# Altium PCB switch_tx.PcbDoc
Units mm, origin at the board's own origin, x right, y up, seen from the top; angles counter-clockwise.
Board outline 49.91 x 62.61 mm, 2 copper layers (Top Layer, Bottom Layer); 41 components, 31 nets, 151 pads, 1462 vias.
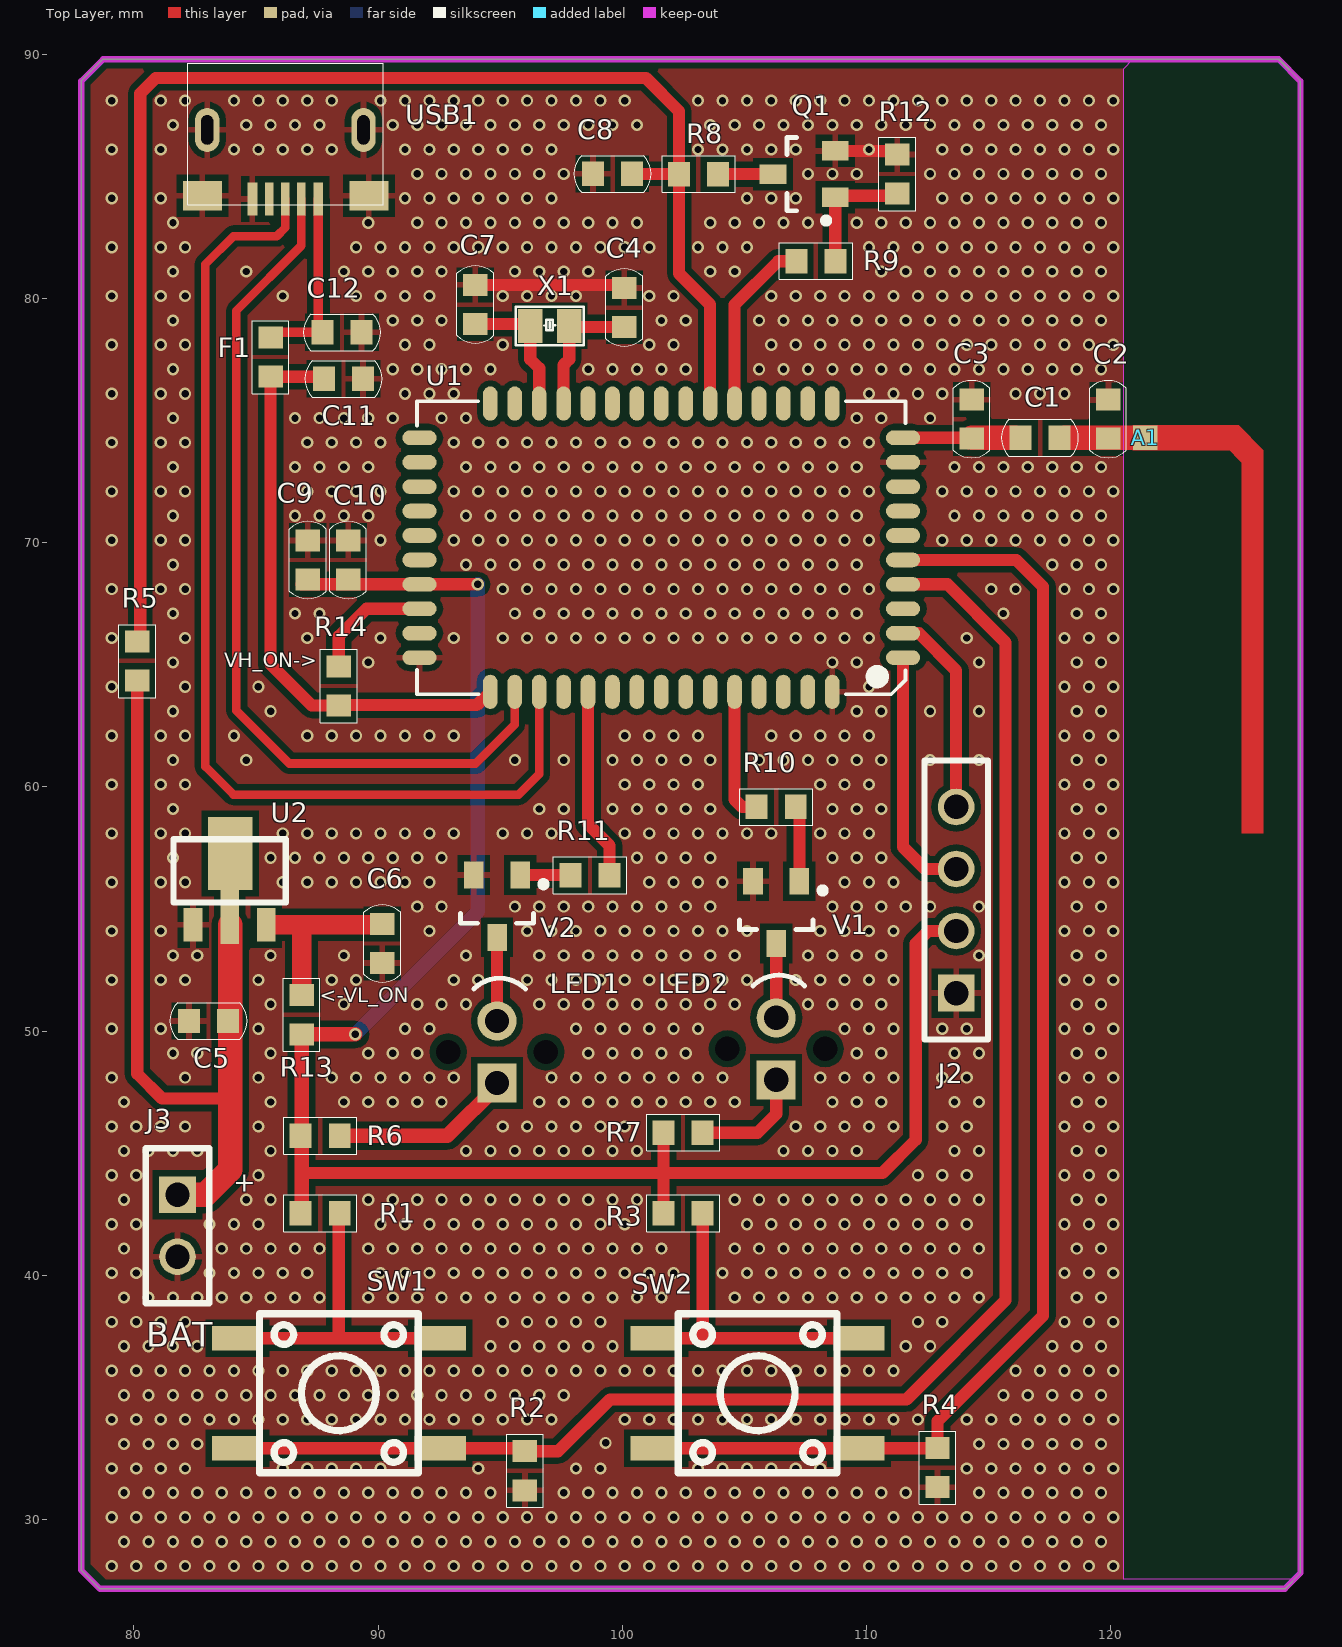
[diagram p0: Top Layer view]
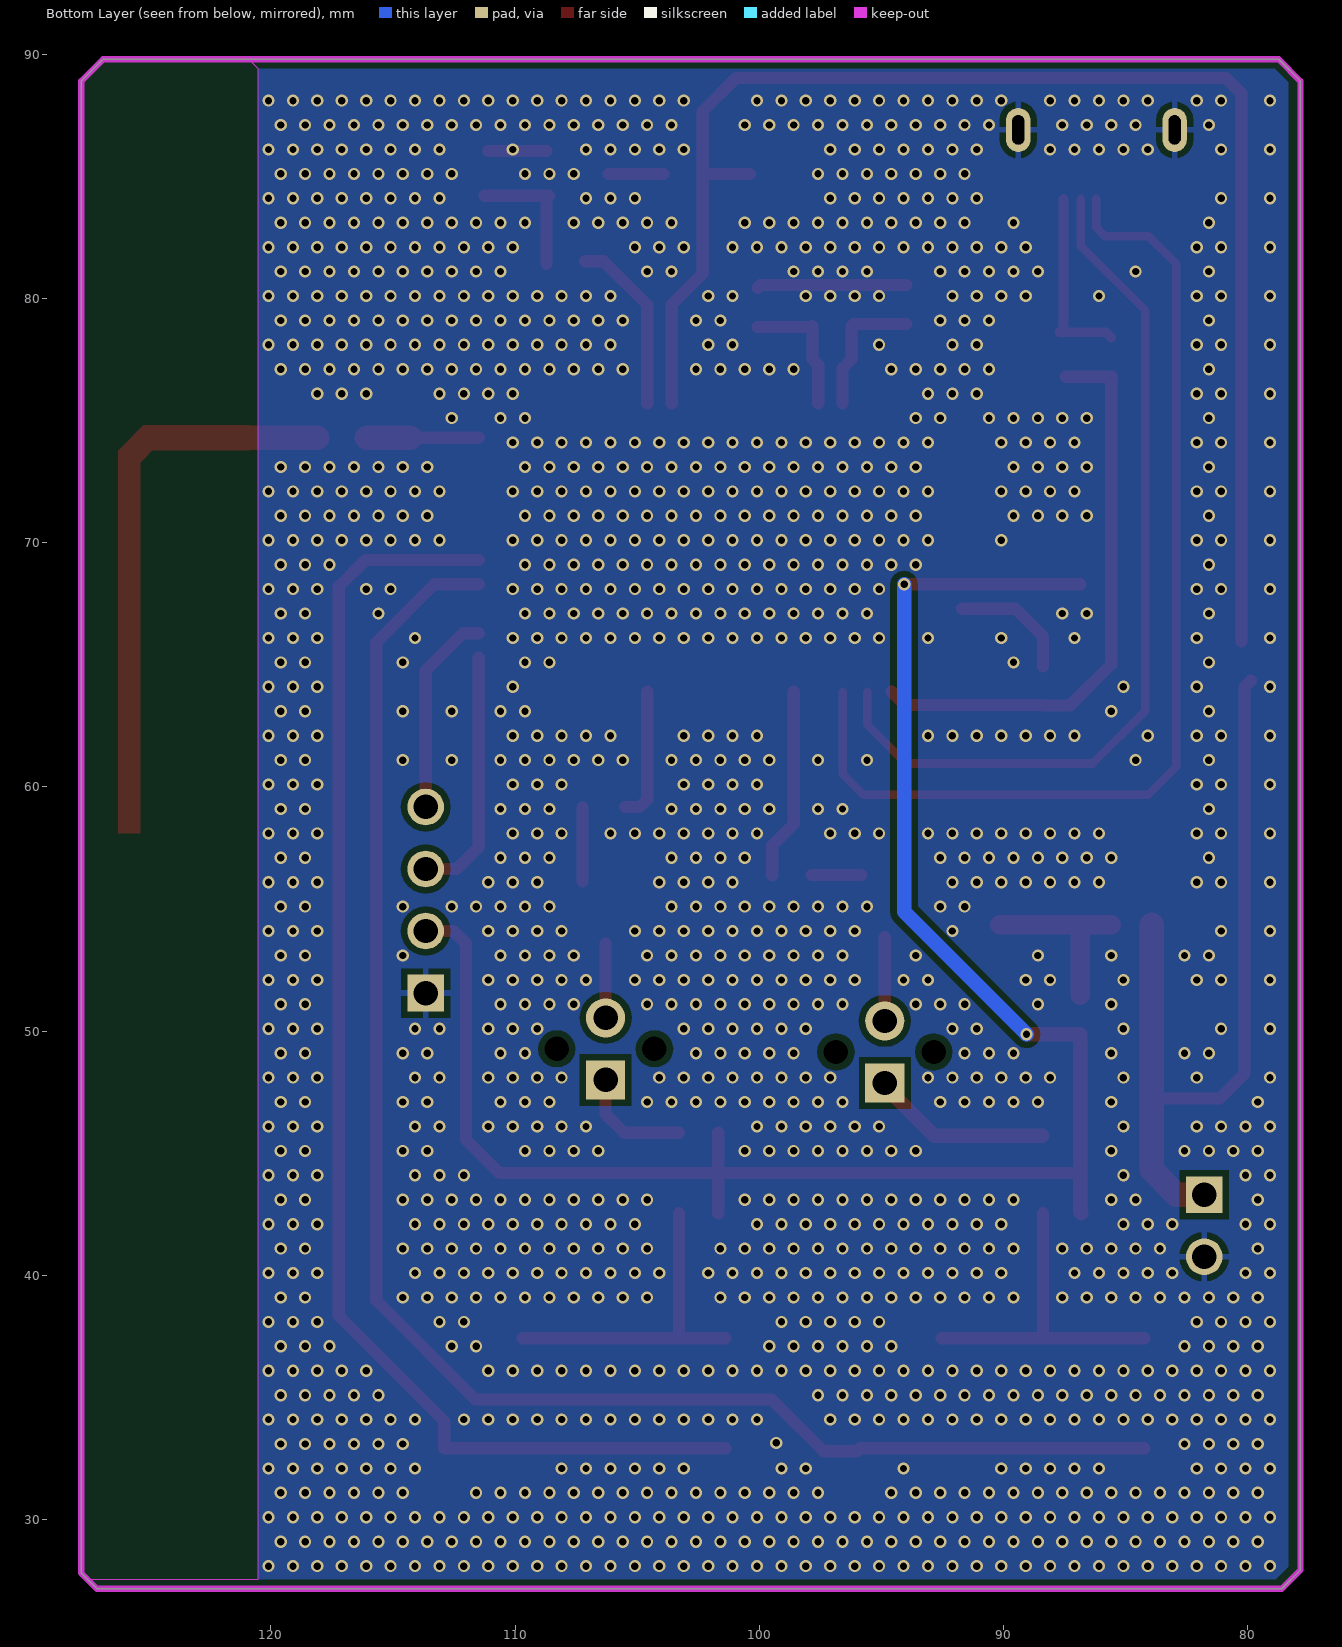
[diagram p1: Bottom Layer view, seen from below]

## Layer stack, top to bottom
Top Solder: solder mask 0.0102, Solder Resist, Dk 3.5
Top Layer: signal copper 0.0356
Dielectric 1: dielectric 0.32, FR-4, Dk 4.8
Bottom Layer: signal copper 0.0356
Bottom Solder: solder mask 0.0102, Solder Resist, Dk 3.5

## Board outline
77.851,27.94 78.613,27.178 127.127,27.178 127.762,27.813 127.762,88.9 126.873,89.789 78.74,89.789 77.851,88.9

## Design rules (kind name [scope] priority, off if disabled: settings)
Clearance [All] p1: gap=0.254
PlaneConnect [All] p1: planeconnectstyle=Direct reliefexpansion=0.508 reliefentries=4 reliefconductorwidth=0.254 reliefairgap=0.254
PolygonConnect PolygonConnect_1 [All vs IsVia] p1: connectstyle=Direct reliefconductorwidth=0.254 reliefentries=4 polygonreliefangle="90 Angle" airgapwidth=0.254
PolygonConnect [All] p2: connectstyle=Relief reliefconductorwidth=0.254 reliefentries=4 polygonreliefangle="90 Angle" airgapwidth=0.254
RoutingVias [All] p1: holewidth=0.711 width=1.27 viastyle="Through Hole" minholewidth=0.711 minwidth=1.27 maxholewidth=0.711 maxwidth=1.27
SolderMaskExpansion [All] p1: expansion=0.102
Width [All] p1: maxlimit=2 minlimit=0.254 preferedwidth=0.254
29 further rules are at their usual default settings.

## Components (designator, comment, footprint, x,y, rotation, side; value= is the part's Value field where it differs from the comment)
A1 "ANTENNA" AN2 121.412,74.295 r0 top
C1 "CAP" cap0603(1608) 117.094,74.295 r180 top
C2 "CAP" cap0603(1608) 119.888,75.057 r270 top
C3 "CAP" cap0603(1608) 114.3,75.057 r90 top
C4 "CAP" cap0603(1608) 100.076,79.629 r270 top
C5 "CC103" cap0603(1608) 83.058,50.419 r180 top
C6 "CC103" cap0603(1608) 90.17,53.594 r270 top
C7 "CAP" cap0603(1608) 93.98,79.756 r270 top
C8 "CAP" cap0603(1608) 99.6,85.1 r0 top
C9 "CC103" cap0603(1608) 87.122,69.29 r90 top
C10 "CC103" cap0603(1608) 88.773,69.29 r90 top
C11 "CC103" cap0603(1608) 88.584,76.708 r0 top
C12 "CC103" cap0603(1608) 88.519,78.613 r0 top
F1 "1A" RESC0603(1608)_N 85.598,77.597 r90 top
J2 "HEAD-1x4" HEAD-1x4-2.54 113.665,51.562 r90 top
J3 "BAT" HEAD-1x2-2.54 81.788,43.307 r270 top
LED1 "LED" led_3mm 94.869,49.149 r90 top
LED2 "LED" led_3mm 106.299,49.276 r90 top
Q1 "BSH103" SOT-23-mosfet 107.442,85.09 r90 top
R1 "10K" RESC0603(1608)_N 87.63,42.545 r180 top
R2 "100K" RESC0603(1608)_N 96.012,32.004 r90 top
R3 "10K" RESC0603(1608)_N 102.489,42.545 r180 top
R4 "100K" RESC0603(1608)_N 112.903,32.131 r270 top
R5 "47K_1%" RESC0603(1608)_N 80.137,65.151 r90 top
R6 "4.7K" RESC0603(1608)_N 87.63,45.72 r180 top
R7 "4.7K" RESC0603(1608)_N 102.489,45.847 r180 top
R8 "22K_1%" RESC0603(1608)_N 103.124,85.09 r180 top
R9 "1K" RESC0603(1608)_N 107.93,81.526 r180 top
R10 "10K" RESC0603(1608)_N 106.299,59.182 r0 top
R11 "10K" RESC0603(1608)_N 98.679,56.388 r180 top
R12 "100K" RESC0603(1608)_N 111.252,85.09 r270 top
R13 "0" RESC0603(1608)_N 86.868,50.673 r90 top
R14 "NC" RESC0603(1608)_N 88.392,64.135 r90 top
SW1 "TACT" SW_6X6X5mm 88.392,35.179 r180 top
SW2 "TACT" SW_6X6X5mm 105.537,35.179 r180 top
U1 "MO100F7, nRF52840 module, YuLiWuLi" MO100F7 91.694,74.295 r270 top locked
U2 "HT7333" HT7333-SOT-89 82.423,54.356 r0 top
USB1 "32010-05002-1220" "MICRO USB" 87.553,84.074 r0 top
V1 "NPN" SOT-23-NPN 106.299,54.864 r180 top
V2 "NPN" SOT-23-NPN 94.869,55.118 r180 top
X1 "32.768KHz" 32.768_A 97.028,78.867 r0 top

## Footprints (in the part's own frame and the unit in brackets; to place one, negate y for a bottom-side part, rotate by r counter-clockwise, add the part's x,y. Pads: shape width x height; smd on the part's side, far side on the other; paste and mask are expansions set on the pad)
32.768_A [mm]
  rect 1x1.4 smd mask+0.05: 1(-0.8,0) 2(0.8,0)
  silkscreen extent -1.4,-0.79 1.4,0.79, body extent -1.1,-0.67 1.1,0.68, height 0.7
AN2 [mm]
  rect 1x1 smd: 1(0,0)
  Top Layer region: 3.109,-0.188 4.132,-1.211 4.842,-0.501 3.819,0.522
  Top Layer region: 3.937,-16.202 4.842,-16.202 4.842,-0.501 3.937,-0.501
  Top Layer region: -0.534,0.522 -0.534,-0.524 3.819,-0.524 3.819,0.522
cap0603(1608) [mm] "Chip capcitance, Body 1.6x0.8mm, IPC Medium Density"
  rect 0.9x1 smd: 1(-0.8,0) 2(0.8,0)
  silkscreen extent -1.58,-0.75 1.58,0.75, body extent -0.85,-0.47 0.85,0.47, height 0.6
HEAD-1x2-2.54 [mm]
  rect 1.5x1.5 hole 1: 1(0,0)
  round 1.5 hole 1: 2(2.54,0)
  silkscreen extent -1.9,-1.3 4.44,1.3
HEAD-1x4-2.54 [mm]
  rect 1.5x1.5 hole 1: 1(0,0)
  round 1.5 hole 1: 2(2.54,0) 3(5.08,0) 4(7.62,0)
  silkscreen extent -1.9,-1.3 9.53,1.3
HT7333-SOT-89 [mil]
  rect 30x54 smd: 1(0,0) 3(118,0)
  rect 30x86.61 smd: 2(59,12.76)
  rect 72x118.11 smd: 2(60,115)
  silkscreen extent -32,36 150,138
led_3mm [mm] "LED_3MM"
  rect 1.6x1.6 / inner round 1.524 / far side rect 1.6x1.6 hole 1: 1(-1.27,0)
  round 1.6 / inner round 1.524 / far side round 1.6 hole 1: 2(1.27,0)
  round 0.1 / inner round 1.524 / far side round 0.1 hole 1 unplated: " "(0,2) " "(0,-2)
  silkscreen extent 2.58,-1.17 3.02,0.95, body extent -2.51,-2.51 2.51,2.51, height 3.81
"MICRO USB" [mm]
  rect 0.4x1.35 smd: 1(0,0) 5(-2.7,0)
  rect 0.35x1.35 smd: 2(-0.7,0) 3(-1.35,0) 4(-2,0)
  oval 1x1.8 hole 0.5 slot 1.2 at 90 deg: 6(1.85,2.827) 7(-4.55,2.827)
  rect 1.6x1.2 smd: 6(2.07,0.127) 7(-4.749,0.127)
  silkscreen extent -5.35,-0.25 2.65,5.56, body extent -5.35,-0.26 2.65,5.56, height 2.77
MO100F7 [mm]
  oval 0.6x1.4 smd mask+0.06: 1(0,0) 2(1,0) 3(2,0) 4(3,0) 5(4,0) 6(5,0) 7(6,0) 8(7,0) 9(8,0) 10(9,0) 26(9,19.8) 27(8,19.8) 28(7,19.8) 29(6,19.8) 30(5,19.8) 31(4,19.8) 32(3,19.8) 33(2,19.8) 34(1,19.8) 35(0,19.8)
  oval 1.4x0.6 smd mask+0.06: 11(10.4,2.9) 12(10.4,3.9) 13(10.4,4.9) 14(10.4,5.9) 15(10.4,6.9) 16(10.4,7.9) 17(10.4,8.9) 18(10.4,9.9) 19(10.4,10.9) 20(10.4,11.9) 21(10.4,12.9) 22(10.4,13.9) 23(10.4,14.9) 24(10.4,15.9) 25(10.4,16.9) 36(-1.4,16.9) 37(-1.4,15.9) 38(-1.4,14.9) 39(-1.4,13.9) 40(-1.4,12.9) 41(-1.4,11.9) 42(-1.4,10.9) 43(-1.4,9.9) 44(-1.4,8.9) 45(-1.4,7.9) 46(-1.4,6.9) 47(-1.4,5.9) 48(-1.4,4.9) 49(-1.4,3.9) 50(-1.4,2.9)
  silkscreen extent -1.5,-0.1 10.5,19.9, body extent -1.52,-0.13 10.54,19.94, height 2.05
RESC0603(1608)_N [mm] "Chip Resistor, Body 1.6x0.8mm, IPC Medium Density"
  rect 0.9x1 smd: 1(-0.8,0) 2(0.8,0)
  silkscreen extent -1.5,-0.75 1.5,0.75, body extent -0.85,-0.47 0.85,0.47, height 0.6
SOT-23-mosfet [mm] "SOT-23, 3-Leads, Body 3,0x2,6mm (max), Pitch 0,95mm, IPC Medium Density"
  rect 0.8x1.1 smd: D(0,1.275) G(-0.95,-1.275) S(0.95,-1.275)
  silkscreen extent -2.03,-1.03 1.5,0.7, body extent -1.45,-1.21 1.45,1.21, height 0.98
SOT-23-NPN [mm]
  rect 0.8x1.1 smd: B(-0.95,-1.275) C(0,1.275) E(0.95,-1.275)
  silkscreen extent -2.03,-1.02 1.5,0.7, body extent -1.45,-1.21 1.45,1.21, height 0.98
SW_6X6X5mm [mm]
  rect 2.1x1 smd: 1(-4.15,2.25) 1(4.15,2.25) 2(-4.15,-2.25) 2(4.15,-2.25)
  silkscreen extent -3.25,-3.25 3.25,3.25, body extent -4.5,-3 4.5,3, height 5

## Part data
A1: "PCB Antenna"
J3: library part HEAD-1x2
Q1: library part MOSFET-N, "N channel MOSFET, 20V, 3.7A, 39mohm"
SW1 SW2: library part SWITCH_TACT_SPST_2-2_PINS
U1: library part MO100F7
USB1: library part Component_1, "Mirco_USB_5S_B"
X1: library part Crystal_2PIN

## Via types
v1: diameter 0.5, hole 0.3, Top Layer to Bottom Layer, tented both sides, 1462 vias

## Nets (pads, with @x,y where several pads share a name; then routed paths per layer and width w, separated by ;. In a path a pad name is that pad's centre, name@x,y a point inside that pad or via, vN(x,y) a via of type N, cw(c..) or ccw(c..) an arc to the next point about the centre after c; other vN are vias at no path point)
BAT+: C5.1 J3.1 R5.1 U2.2 | length 33
  Top Layer w0.5: R5.1@79.883,64.351 80.137,64.097 80.137,48.26 81.153,47.244 83.947,47.244
  Top Layer w1: J3.1 82.931,43.307 83.947,44.323 U2.2@83.947,54.356
BAT_DET: C8.2 R5.2 R8.2 U1.41 | length 59.7
  Top Layer w0.5: R5.2@80.264,65.951 80.264,88.392 80.899,89.027 100.965,89.027 102.324,87.668 R8.2 102.324,81.024 103.594,79.754 U1.41 ; C8.2 R8.2@102.314,85.1
BAT_DET_EN: R9.2 U1.40 | length 7.3
  Top Layer w0.5: U1.40 104.594,79.74 106.38,81.526 R9.2
D+: U1.13 USB1.3 | length 43.5
  Top Layer w0.35: USB1.3 86.203,82.901 85.852,82.55 84.074,82.55 82.931,81.407 82.931,60.833 84.074,59.69 95.758,59.69 96.594,60.526 U1.13
D-: U1.12 USB1.2 | length 36.3
  Top Layer w0.35: USB1.2 86.853,82.154 84.201,79.502 84.201,63.119 86.36,60.96 93.996,60.96 95.594,62.558 U1.12
GND: C2.1 C3.2 C4.1 C5.2 C6.2 C7.1 C8.1 C9.2 C10.2 C11.2 C12.2 J2.1 J3.2 Q1.S R2.1 R4.2 R12.1 U1.10 U1.25 U1.34 U2.1 USB1.5 USB1.6 USB1.7 V1.E V2.E | length 8.5
  Top Layer w0.5: C7.1 99.949,80.556 C4.1 ; Q1.S R12.1@111.102,86.04
  other v1: 79.1,28.1 80.1,28.1 81.1,28.1 82.1,28.1 83.1,28.1 84.1,28.1 85.1,28.1 86.1,28.1 87.1,28.1 88.1,28.1 89.1,28.1 90.1,28.1 91.1,28.1 92.1,28.1 93.1,28.1 94.1,28.1 95.1,28.1 96.1,28.1 97.1,28.1 98.1,28.1 99.1,28.1 100.1,28.1 101.1,28.1 102.1,28.1 103.1,28.1 104.1,28.1 105.1,28.1 106.1,28.1 107.1,28.1 108.1,28.1 109.1,28.1 110.1,28.1 111.1,28.1 112.1,28.1 113.1,28.1 114.1,28.1 115.1,28.1 116.1,28.1 117.1,28.1 118.1,28.1 119.1,28.1 120.1,28.1 79.6,29.1 80.6,29.1 81.6,29.1 82.6,29.1 83.6,29.1 84.6,29.1 85.6,29.1 86.6,29.1 87.6,29.1 88.6,29.1 89.6,29.1 90.6,29.1 91.6,29.1 92.6,29.1 93.6,29.1 94.6,29.1 95.6,29.1 96.6,29.1 97.6,29.1 98.6,29.1 99.6,29.1 100.6,29.1 101.6,29.1 102.6,29.1 103.6,29.1 104.6,29.1 105.6,29.1 106.6,29.1 107.6,29.1 108.6,29.1 109.6,29.1 110.6,29.1 111.6,29.1 112.6,29.1 113.6,29.1 114.6,29.1 115.6,29.1 116.6,29.1 117.6,29.1 118.6,29.1 119.6,29.1 79.1,30.1 80.1,30.1 81.1,30.1 82.1,30.1 83.1,30.1 84.1,30.1 85.1,30.1 86.1,30.1 87.1,30.1 88.1,30.1 89.1,30.1 90.1,30.1 91.1,30.1 92.1,30.1 93.1,30.1 94.1,30.1 95.1,30.1 96.1,30.1 97.1,30.1 98.1,30.1 99.1,30.1 100.1,30.1 101.1,30.1 102.1,30.1 103.1,30.1 104.1,30.1 105.1,30.1 106.1,30.1 107.1,30.1 108.1,30.1 109.1,30.1 110.1,30.1 111.1,30.1 112.1,30.1 113.1,30.1 114.1,30.1 115.1,30.1 116.1,30.1 117.1,30.1 118.1,30.1 119.1,30.1 120.1,30.1 79.6,31.1 80.6,31.1 81.6,31.1 82.6,31.1 83.6,31.1 84.6,31.1 85.6,31.1 86.6,31.1 87.6,31.1 88.6,31.1 89.6,31.1 90.6,31.1 91.6,31.1 92.6,31.1 93.6,31.1 94.6,31.1 97.6,31.1 98.6,31.1 99.6,31.1 100.6,31.1 101.6,31.1 102.6,31.1 103.6,31.1 104.6,31.1 105.6,31.1 106.6,31.1 107.6,31.1 108.6,31.1 109.6,31.1 110.6,31.1 111.6,31.1 114.6,31.1 115.6,31.1 116.6,31.1 117.6,31.1 118.6,31.1 119.6,31.1 79.1,32.1 80.1,32.1 81.1,32.1 82.1,32.1 86.1,32.1 87.1,32.1 88.1,32.1 89.1,32.1 90.1,32.1 94.1,32.1 98.1,32.1 99.1,32.1 103.1,32.1 104.1,32.1 105.1,32.1 106.1,32.1 107.1,32.1 108.1,32.1 114.1,32.1 115.1,32.1 116.1,32.1 117.1,32.1 118.1,32.1 119.1,32.1 120.1,32.1 79.6,33.1 80.6,33.1 81.6,33.1 82.6,33.1 114.6,33.1 115.6,33.1 116.6,33.1 117.6,33.1 118.6,33.1 119.6,33.1 99.314,33.147 79.1,34.1 80.1,34.1 81.1,34.1 82.1,34.1 83.1,34.1 84.1,34.1 85.1,34.1 86.1,34.1 87.1,34.1 88.1,34.1 89.1,34.1 90.1,34.1 91.1,34.1 92.1,34.1 93.1,34.1 94.1,34.1 95.1,34.1 96.1,34.1 97.1,34.1 100.1,34.1 101.1,34.1 102.1,34.1 103.1,34.1 104.1,34.1 105.1,34.1 106.1,34.1 107.1,34.1 108.1,34.1 109.1,34.1 110.1,34.1 111.1,34.1 112.1,34.1 114.1,34.1 115.1,34.1 116.1,34.1 117.1,34.1 118.1,34.1 119.1,34.1 120.1,34.1 79.6,35.1 80.6,35.1 81.6,35.1 82.6,35.1 83.6,35.1 84.6,35.1 85.6,35.1 86.6,35.1 87.6,35.1 88.6,35.1 89.6,35.1 90.6,35.1 91.6,35.1 92.6,35.1 93.6,35.1 94.6,35.1 95.6,35.1 96.6,35.1 97.6,35.1 115.6,35.1 116.6,35.1 117.6,35.1 118.6,35.1 119.6,35.1 79.1,36.1 80.1,36.1 81.1,36.1 82.1,36.1 83.1,36.1 84.1,36.1 85.1,36.1 86.1,36.1 87.1,36.1 88.1,36.1 89.1,36.1 90.1,36.1 91.1,36.1 92.1,36.1 93.1,36.1 94.1,36.1 95.1,36.1 96.1,36.1 97.1,36.1 98.1,36.1 99.1,36.1 100.1,36.1 101.1,36.1 102.1,36.1 103.1,36.1 104.1,36.1 105.1,36.1 106.1,36.1 107.1,36.1 108.1,36.1 109.1,36.1 110.1,36.1 111.1,36.1 116.1,36.1 117.1,36.1 118.1,36.1 119.1,36.1 120.1,36.1 79.6,37.1 80.6,37.1 81.6,37.1 82.6,37.1 94.6,37.1 95.6,37.1 96.6,37.1 97.6,37.1 98.6,37.1 99.6,37.1 111.6,37.1 112.6,37.1 117.6,37.1 118.6,37.1 119.6,37.1 79.1,38.1 80.1,38.1 81.1,38.1 82.1,38.1 95.1,38.1 96.1,38.1 97.1,38.1 98.1,38.1 99.1,38.1 112.1,38.1 113.1,38.1 118.1,38.1 119.1,38.1 120.1,38.1 79.6,39.1 80.6,39.1 81.6,39.1 82.6,39.1 83.6,39.1 84.6,39.1 85.6,39.1 86.6,39.1 87.6,39.1 89.6,39.1 90.6,39.1 91.6,39.1 92.6,39.1 93.6,39.1 94.6,39.1 95.6,39.1 96.6,39.1 97.6,39.1 98.6,39.1 99.6,39.1 100.6,39.1 101.6,39.1 104.6,39.1 105.6,39.1 106.6,39.1 107.6,39.1 108.6,39.1 109.6,39.1 110.6,39.1 111.6,39.1 112.6,39.1 113.6,39.1 114.6,39.1 118.6,39.1 119.6,39.1 79.1,40.1 80.1,40.1 83.1,40.1 84.1,40.1 85.1,40.1 86.1,40.1 87.1,40.1 90.1,40.1 91.1,40.1 92.1,40.1 93.1,40.1 94.1,40.1 95.1,40.1 96.1,40.1 97.1,40.1 98.1,40.1 99.1,40.1 100.1,40.1 101.1,40.1 102.1,40.1 104.1,40.1 105.1,40.1 106.1,40.1 107.1,40.1 108.1,40.1 109.1,40.1 110.1,40.1 111.1,40.1 112.1,40.1 113.1,40.1 114.1,40.1 118.1,40.1 119.1,40.1 120.1,40.1 79.6,41.1 83.6,41.1 84.6,41.1 85.6,41.1 86.6,41.1 87.6,41.1 89.6,41.1 90.6,41.1 91.6,41.1 92.6,41.1 93.6,41.1 94.6,41.1 95.6,41.1 96.6,41.1 97.6,41.1 98.6,41.1 99.6,41.1 100.6,41.1 101.6,41.1 104.6,41.1 105.6,41.1 106.6,41.1 107.6,41.1 108.6,41.1 109.6,41.1 110.6,41.1 111.6,41.1 112.6,41.1 113.6,41.1 114.6,41.1 118.6,41.1 119.6,41.1 79.1,42.1 80.1,42.1 83.1,42.1 84.1,42.1 85.1,42.1 90.1,42.1 91.1,42.1 92.1,42.1 93.1,42.1 94.1,42.1 95.1,42.1 96.1,42.1 97.1,42.1 98.1,42.1 99.1,42.1 100.1,42.1 105.1,42.1 106.1,42.1 107.1,42.1 108.1,42.1 109.1,42.1 110.1,42.1 111.1,42.1 112.1,42.1 113.1,42.1 114.1,42.1 118.1,42.1 119.1,42.1 120.1,42.1 79.6,43.1 84.6,43.1 85.6,43.1 89.6,43.1 90.6,43.1 91.6,43.1 92.6,43.1 93.6,43.1 94.6,43.1 95.6,43.1 96.6,43.1 97.6,43.1 98.6,43.1 99.6,43.1 100.6,43.1 104.6,43.1 105.6,43.1 106.6,43.1 107.6,43.1 108.6,43.1 109.6,43.1 110.6,43.1 111.6,43.1 112.6,43.1 113.6,43.1 114.6,43.1 118.6,43.1 119.6,43.1 79.1,44.1 80.1,44.1 85.1,44.1 112.1,44.1 113.1,44.1 114.1,44.1 118.1,44.1 119.1,44.1 120.1,44.1 79.6,45.1 80.6,45.1 81.6,45.1 82.6,45.1 85.6,45.1 93.6,45.1 94.6,45.1 95.6,45.1 96.6,45.1 97.6,45.1 98.6,45.1 99.6,45.1 100.6,45.1 106.6,45.1 107.6,45.1 108.6,45.1 109.6,45.1 113.6,45.1 114.6,45.1 118.6,45.1 119.6,45.1 79.1,46.1 80.1,46.1 81.1,46.1 82.1,46.1 85.1,46.1 95.1,46.1 96.1,46.1 97.1,46.1 98.1,46.1 99.1,46.1 100.1,46.1 107.1,46.1 108.1,46.1 109.1,46.1 110.1,46.1 111.1,46.1 113.1,46.1 114.1,46.1 118.1,46.1 119.1,46.1 120.1,46.1 79.6,47.1 85.6,47.1 88.6,47.1 89.6,47.1 90.6,47.1 91.6,47.1 92.6,47.1 96.6,47.1 97.6,47.1 98.6,47.1 99.6,47.1 100.6,47.1 101.6,47.1 102.6,47.1 103.6,47.1 104.6,47.1 108.6,47.1 109.6,47.1 110.6,47.1 113.6,47.1 114.6,47.1 118.6,47.1 119.6,47.1 79.1,48.1 82.1,48.1 85.1,48.1 88.1,48.1 89.1,48.1 90.1,48.1 91.1,48.1 92.1,48.1 93.1,48.1 97.1,48.1 98.1,48.1 99.1,48.1 100.1,48.1 101.1,48.1 102.1,48.1 103.1,48.1 104.1,48.1 108.1,48.1 109.1,48.1 110.1,48.1 111.1,48.1 113.1,48.1 114.1,48.1 118.1,48.1 119.1,48.1 120.1,48.1 81.6,49.1 82.6,49.1 85.6,49.1 89.6,49.1 90.6,49.1 91.6,49.1 98.6,49.1 99.6,49.1 100.6,49.1 101.6,49.1 102.6,49.1 109.6,49.1 110.6,49.1 113.6,49.1 114.6,49.1 118.6,49.1 119.6,49.1 79.1,50.1 81.1,50.1 85.1,50.1 91.1,50.1 92.1,50.1 98.1,50.1 99.1,50.1 100.1,50.1 101.1,50.1 102.1,50.1 103.1,50.1 109.1,50.1 110.1,50.1 111.1,50.1 113.1,50.1 114.1,50.1 118.1,50.1 119.1,50.1 120.1,50.1 85.6,51.1 88.6,51.1 91.6,51.1 92.6,51.1 93.6,51.1 96.6,51.1 97.6,51.1 98.6,51.1 99.6,51.1 100.6,51.1 101.6,51.1 102.6,51.1 103.6,51.1 104.6,51.1 107.6,51.1 108.6,51.1 109.6,51.1 110.6,51.1 118.6,51.1 119.6,51.1 79.1,52.1 81.1,52.1 82.1,52.1 85.1,52.1 88.1,52.1 89.1,52.1 93.1,52.1 94.1,52.1 96.1,52.1 97.1,52.1 98.1,52.1 99.1,52.1 100.1,52.1 101.1,52.1 102.1,52.1 103.1,52.1 104.1,52.1 105.1,52.1 107.1,52.1 108.1,52.1 109.1,52.1 110.1,52.1 111.1,52.1 118.1,52.1 119.1,52.1 120.1,52.1 81.6,53.1 82.6,53.1 85.6,53.1 88.6,53.1 93.6,53.1 96.6,53.1 97.6,53.1 98.6,53.1 99.6,53.1 100.6,53.1 101.6,53.1 102.6,53.1 103.6,53.1 104.6,53.1 107.6,53.1 108.6,53.1 109.6,53.1 110.6,53.1 114.6,53.1 118.6,53.1 119.6,53.1 79.1,54.1 81.1,54.1 92.1,54.1 96.1,54.1 97.1,54.1 98.1,54.1 99.1,54.1 100.1,54.1 101.1,54.1 102.1,54.1 103.1,54.1 104.1,54.1 105.1,54.1 108.1,54.1 109.1,54.1 110.1,54.1 111.1,54.1 118.1,54.1 119.1,54.1 120.1,54.1 91.6,55.1 92.6,55.1 95.6,55.1 96.6,55.1 97.6,55.1 98.6,55.1 99.6,55.1 100.6,55.1 101.6,55.1 102.6,55.1 103.6,55.1 108.6,55.1 109.6,55.1 110.6,55.1 111.6,55.1 112.6,55.1 114.6,55.1 118.6,55.1 119.6,55.1 79.1,56.1 81.1,56.1 82.1,56.1 86.1,56.1 87.1,56.1 88.1,56.1 89.1,56.1 90.1,56.1 91.1,56.1 92.1,56.1 101.1,56.1 102.1,56.1 103.1,56.1 104.1,56.1 109.1,56.1 110.1,56.1 111.1,56.1 118.1,56.1 119.1,56.1 120.1,56.1 81.6,57.1 85.6,57.1 86.6,57.1 87.6,57.1 88.6,57.1 89.6,57.1 90.6,57.1 91.6,57.1 92.6,57.1 100.6,57.1 101.6,57.1 102.6,57.1 103.6,57.1 108.6,57.1 109.6,57.1 110.6,57.1 118.6,57.1 119.6,57.1 79.1,58.1 81.1,58.1 82.1,58.1 86.1,58.1 87.1,58.1 88.1,58.1 89.1,58.1 90.1,58.1 91.1,58.1 92.1,58.1 93.1,58.1 95.1,58.1 96.1,58.1 97.1,58.1 100.1,58.1 101.1,58.1 102.1,58.1 103.1,58.1 104.1,58.1 105.1,58.1 106.1,58.1 108.1,58.1 109.1,58.1 110.1,58.1 118.1,58.1 119.1,58.1 120.1,58.1 81.6,59.1 96.6,59.1 97.6,59.1 99.6,59.1 100.6,59.1 101.6,59.1 102.6,59.1 103.6,59.1 108.6,59.1 109.6,59.1 110.6,59.1 118.6,59.1 119.6,59.1 79.1,60.1 81.1,60.1 82.1,60.1 100.1,60.1 101.1,60.1 102.1,60.1 103.1,60.1 108.1,60.1 109.1,60.1 110.1,60.1 118.1,60.1 119.1,60.1 120.1,60.1 81.6,61.1 84.6,61.1 95.6,61.1 97.6,61.1 99.6,61.1 100.6,61.1 101.6,61.1 102.6,61.1 103.6,61.1 105.6,61.1 106.6,61.1 107.6,61.1 108.6,61.1 109.6,61.1 110.6,61.1 112.6,61.1 114.6,61.1 118.6,61.1 119.6,61.1 79.1,62.1 81.1,62.1 82.1,62.1 84.1,62.1 87.1,62.1 88.1,62.1 89.1,62.1 90.1,62.1 91.1,62.1 92.1,62.1 93.1,62.1 100.1,62.1 101.1,62.1 102.1,62.1 103.1,62.1 106.1,62.1 107.1,62.1 108.1,62.1 109.1,62.1 110.1,62.1 118.1,62.1 119.1,62.1 120.1,62.1 81.6,63.1 85.6,63.1 109.6,63.1 110.6,63.1 112.6,63.1 114.6,63.1 118.6,63.1 119.6,63.1 79.1,64.1 82.1,64.1 85.1,64.1 110.1,64.1 118.1,64.1 119.1,64.1 120.1,64.1 81.6,65.1 89.6,65.1 108.6,65.1 109.6,65.1 114.6,65.1 118.6,65.1 119.6,65.1 79.1,66.1 82.1,66.1 87.1,66.1 90.1,66.1 93.1,66.1 95.1,66.1 96.1,66.1 97.1,66.1 98.1,66.1 99.1,66.1 100.1,66.1 101.1,66.1 102.1,66.1 103.1,66.1 104.1,66.1 105.1,66.1 106.1,66.1 107.1,66.1 108.1,66.1 109.1,66.1 110.1,66.1 114.1,66.1 118.1,66.1 119.1,66.1 120.1,66.1 81.6,67.1 86.6,67.1 87.6,67.1 95.6,67.1 96.6,67.1 97.6,67.1 98.6,67.1 99.6,67.1 100.6,67.1 101.6,67.1 102.6,67.1 103.6,67.1 104.6,67.1 105.6,67.1 106.6,67.1 107.6,67.1 108.6,67.1 109.6,67.1 115.6,67.1 118.6,67.1 119.6,67.1 79.1,68.1 81.1,68.1 82.1,68.1 95.1,68.1 96.1,68.1 97.1,68.1 98.1,68.1 99.1,68.1 100.1,68.1 101.1,68.1 102.1,68.1 103.1,68.1 104.1,68.1 105.1,68.1 106.1,68.1 107.1,68.1 108.1,68.1 109.1,68.1 110.1,68.1 115.1,68.1 116.1,68.1 118.1,68.1 119.1,68.1 120.1,68.1 81.6,69.1 93.6,69.1 94.6,69.1 95.6,69.1 96.6,69.1 97.6,69.1 98.6,69.1 99.6,69.1 100.6,69.1 101.6,69.1 102.6,69.1 103.6,69.1 104.6,69.1 105.6,69.1 106.6,69.1 107.6,69.1 108.6,69.1 109.6,69.1 117.6,69.1 118.6,69.1 119.6,69.1 79.1,70.1 81.1,70.1 82.1,70.1 90.1,70.1 93.1,70.1 94.1,70.1 95.1,70.1 96.1,70.1 97.1,70.1 98.1,70.1 99.1,70.1 100.1,70.1 101.1,70.1 102.1,70.1 103.1,70.1 104.1,70.1 105.1,70.1 106.1,70.1 107.1,70.1 108.1,70.1 109.1,70.1 110.1,70.1 113.1,70.1 114.1,70.1 115.1,70.1 116.1,70.1 117.1,70.1 118.1,70.1 119.1,70.1 120.1,70.1 81.6,71.1 86.6,71.1 87.6,71.1 88.6,71.1 89.6,71.1 93.6,71.1 94.6,71.1 95.6,71.1 96.6,71.1 97.6,71.1 98.6,71.1 99.6,71.1 100.6,71.1 101.6,71.1 102.6,71.1 103.6,71.1 104.6,71.1 105.6,71.1 106.6,71.1 107.6,71.1 108.6,71.1 109.6,71.1 113.6,71.1 114.6,71.1 115.6,71.1 116.6,71.1 117.6,71.1 118.6,71.1 119.6,71.1 79.1,72.1 81.1,72.1 82.1,72.1 87.1,72.1 88.1,72.1 89.1,72.1 90.1,72.1 93.1,72.1 94.1,72.1 95.1,72.1 96.1,72.1 97.1,72.1 98.1,72.1 99.1,72.1 100.1,72.1 101.1,72.1 102.1,72.1 103.1,72.1 104.1,72.1 105.1,72.1 106.1,72.1 107.1,72.1 108.1,72.1 109.1,72.1 110.1,72.1 113.1,72.1 114.1,72.1 115.1,72.1 116.1,72.1 117.1,72.1 118.1,72.1 119.1,72.1 120.1,72.1 81.6,73.1 86.6,73.1 87.6,73.1 88.6,73.1 89.6,73.1 93.6,73.1 94.6,73.1 95.6,73.1 96.6,73.1 97.6,73.1 98.6,73.1 99.6,73.1 100.6,73.1 101.6,73.1 102.6,73.1 103.6,73.1 104.6,73.1 105.6,73.1 106.6,73.1 107.6,73.1 108.6,73.1 109.6,73.1 113.6,73.1 114.6,73.1 115.6,73.1 116.6,73.1 117.6,73.1 118.6,73.1 119.6,73.1 79.1,74.1 81.1,74.1 82.1,74.1 87.1,74.1 88.1,74.1 89.1,74.1 90.1,74.1 93.1,74.1 94.1,74.1 95.1,74.1 96.1,74.1 97.1,74.1 98.1,74.1 99.1,74.1 100.1,74.1 101.1,74.1 102.1,74.1 103.1,74.1 104.1,74.1 105.1,74.1 106.1,74.1 107.1,74.1 108.1,74.1 109.1,74.1 110.1,74.1 81.6,75.1 86.6,75.1 87.6,75.1 88.6,75.1 89.6,75.1 90.6,75.1 92.6,75.1 93.6,75.1 109.6,75.1 110.6,75.1 112.6,75.1 79.1,76.1 81.1,76.1 82.1,76.1 91.1,76.1 92.1,76.1 93.1,76.1 110.1,76.1 111.1,76.1 112.1,76.1 113.1,76.1 116.1,76.1 117.1,76.1 118.1,76.1 81.6,77.1 90.6,77.1 91.6,77.1 92.6,77.1 93.6,77.1 94.6,77.1 98.6,77.1 99.6,77.1 100.6,77.1 101.6,77.1 102.6,77.1 105.6,77.1 106.6,77.1 107.6,77.1 108.6,77.1 109.6,77.1 110.6,77.1 111.6,77.1 112.6,77.1 113.6,77.1 114.6,77.1 115.6,77.1 116.6,77.1 117.6,77.1 118.6,77.1 119.6,77.1 79.1,78.1 81.1,78.1 82.1,78.1 91.1,78.1 92.1,78.1 95.1,78.1 101.1,78.1 102.1,78.1 106.1,78.1 107.1,78.1 108.1,78.1 109.1,78.1 110.1,78.1 111.1,78.1 112.1,78.1 113.1,78.1 114.1,78.1 115.1,78.1 116.1,78.1 117.1,78.1 118.1,78.1 119.1,78.1 120.1,78.1 81.6,79.1 90.6,79.1 91.6,79.1 92.6,79.1 101.6,79.1 102.6,79.1 105.6,79.1 106.6,79.1 107.6,79.1 108.6,79.1 109.6,79.1 110.6,79.1 111.6,79.1 112.6,79.1 113.6,79.1 114.6,79.1 115.6,79.1 116.6,79.1 117.6,79.1 118.6,79.1 119.6,79.1 79.1,80.1 81.1,80.1 82.1,80.1 86.1,80.1 89.1,80.1 90.1,80.1 91.1,80.1 92.1,80.1 95.1,80.1 96.1,80.1 97.1,80.1 98.1,80.1 101.1,80.1 102.1,80.1 106.1,80.1 107.1,80.1 108.1,80.1 109.1,80.1 110.1,80.1 111.1,80.1 112.1,80.1 113.1,80.1 114.1,80.1 115.1,80.1 116.1,80.1 117.1,80.1 118.1,80.1 119.1,80.1 120.1,80.1 81.6,81.1 84.6,81.1 88.6,81.1 89.6,81.1 90.6,81.1 91.6,81.1 92.6,81.1 95.6,81.1 96.6,81.1 97.6,81.1 98.6,81.1 103.6,81.1 104.6,81.1 110.6,81.1 111.6,81.1 112.6,81.1 113.6,81.1 114.6,81.1 115.6,81.1 116.6,81.1 117.6,81.1 118.6,81.1 119.6,81.1 79.1,82.1 81.1,82.1 82.1,82.1 89.1,82.1 90.1,82.1 91.1,82.1 92.1,82.1 93.1,82.1 94.1,82.1 95.1,82.1 96.1,82.1 97.1,82.1 98.1,82.1 99.1,82.1 100.1,82.1 101.1,82.1 103.1,82.1 104.1,82.1 105.1,82.1 110.1,82.1 111.1,82.1 112.1,82.1 113.1,82.1 114.1,82.1 115.1,82.1 116.1,82.1 117.1,82.1 118.1,82.1 119.1,82.1 120.1,82.1 81.6,83.1 89.6,83.1 91.6,83.1 92.6,83.1 93.6,83.1 94.6,83.1 95.6,83.1 96.6,83.1 97.6,83.1 98.6,83.1 99.6,83.1 100.6,83.1 103.6,83.1 104.6,83.1 105.6,83.1 106.6,83.1 107.6,83.1 109.6,83.1 110.6,83.1 111.6,83.1 112.6,83.1 113.6,83.1 114.6,83.1 115.6,83.1 116.6,83.1 117.6,83.1 118.6,83.1 119.6,83.1 79.1,84.1 81.1,84.1 91.1,84.1 92.1,84.1 93.1,84.1 94.1,84.1 95.1,84.1 96.1,84.1 97.1,84.1 105.1,84.1 106.1,84.1 107.1,84.1 113.1,84.1 114.1,84.1 115.1,84.1 116.1,84.1 117.1,84.1 118.1,84.1 119.1,84.1 120.1,84.1 91.6,85.1 92.6,85.1 93.6,85.1 94.6,85.1 95.6,85.1 96.6,85.1 97.6,85.1 107.6,85.1 108.6,85.1 109.6,85.1 112.6,85.1 113.6,85.1 114.6,85.1 115.6,85.1 116.6,85.1 117.6,85.1 118.6,85.1 119.6,85.1 79.1,86.1 81.1,86.1 84.1,86.1 85.1,86.1 86.1,86.1 87.1,86.1 88.1,86.1 91.1,86.1 92.1,86.1 93.1,86.1 94.1,86.1 95.1,86.1 96.1,86.1 97.1,86.1 103.1,86.1 104.1,86.1 105.1,86.1 106.1,86.1 107.1,86.1 110.1,86.1 113.1,86.1 114.1,86.1 115.1,86.1 116.1,86.1 117.1,86.1 118.1,86.1 119.1,86.1 120.1,86.1 81.6,87.1 84.6,87.1 85.6,87.1 86.6,87.1 87.6,87.1 90.6,87.1 91.6,87.1 92.6,87.1 93.6,87.1 94.6,87.1 95.6,87.1 96.6,87.1 97.6,87.1 98.6,87.1 99.6,87.1 100.6,87.1 103.6,87.1 104.6,87.1 105.6,87.1 106.6,87.1 107.6,87.1 108.6,87.1 109.6,87.1 110.6,87.1 111.6,87.1 112.6,87.1 113.6,87.1 114.6,87.1 115.6,87.1 116.6,87.1 117.6,87.1 118.6,87.1 119.6,87.1 79.1,88.1 81.1,88.1 82.1,88.1 84.1,88.1 85.1,88.1 86.1,88.1 87.1,88.1 88.1,88.1 90.1,88.1 91.1,88.1 92.1,88.1 93.1,88.1 94.1,88.1 95.1,88.1 96.1,88.1 97.1,88.1 98.1,88.1 99.1,88.1 100.1,88.1 103.1,88.1 104.1,88.1 105.1,88.1 106.1,88.1 107.1,88.1 108.1,88.1 109.1,88.1 110.1,88.1 111.1,88.1 112.1,88.1 113.1,88.1 114.1,88.1 115.1,88.1 116.1,88.1 117.1,88.1 118.1,88.1 119.1,88.1 120.1,88.1
KEY_1: R2.2 SW1.1 U1.29 | length 66.2
  Top Layer w0.5: SW1.1@84.242,32.929 92.542,32.929 95.887,32.929 R2.2 97.371,32.804 99.492,34.925 111.633,34.925 115.691,38.983 115.691,65.919 113.315,68.295 U1.29
KEY_2: R4.1 SW2.1 U1.30 | length 54.8
  Top Layer w0.5: SW2.1@101.387,32.929 109.687,32.929 112.901,32.929 R4.1 112.903,34.036 117.221,38.354 117.221,68.199 116.125,69.295 U1.30
LED_1: R10.1 U1.21 | length 5.4
  Top Layer w0.5: U1.21 104.594,59.49 104.902,59.182 R10.1
LED_2: R11.1 U1.15 | length 7.9
  Top Layer w0.5: U1.15 98.594,58.486 99.479,57.601 R11.1
NetA1_1: A1.1 C1.1 C2.2 | length 3.3
  Top Layer w1: C1.1@118.11,74.295 A1.1
NetC1_2: C1.2 C3.1 U1.35 | length 4.6
  Top Layer w0.5: U1.35 C3.1@114.3,74.295
  Top Layer w1: C3.1@114.3,74.295 C1.2@116.078,74.295
NetC4_2: C4.2 U1.47 X1.2 | length 5.5
  Top Layer w0.5: U1.47 97.594,77.274 97.828,77.508 X1.2 ; X1.2@97.866,78.829 C4.2
NetC6_1: C6.1 R13.2 U2.3 | length 7.5
  Top Layer w0.8: U2.3@85.598,54.356 86.868,54.356 ; R13.2 86.868,54.356 ; C6.1@90.17,54.356 86.868,54.356
NetC7_2: C7.2 U1.48 X1.1 | length 5.5
  Top Layer w0.5: C7.2 X1.1@96.139,78.956 ; X1.1 96.228,77.508 96.594,77.142 U1.48
NetC12_1: C12.1 F1.2 USB1.1 | length 7.7
  Top Layer w0.4: F1.2 85.814,78.613 C12.1 87.553,78.779 USB1.1
NetJ2_3: J2.3 U1.26 | length 10.3
  Top Layer w0.5: U1.26 111.494,57.543 112.395,56.642 J2.3
NetJ2_4: J2.4 U1.27 | length 8.4
  Top Layer w0.5: U1.27 112.14,66.295 113.665,64.77 J2.4
NetLED1_1: LED1.1 R6.1 | length 7.4
  Top Layer w0.6: R6.1 92.837,45.72 LED1.1@94.933,47.816
NetLED1_2: LED1.2 V2.C | length 3.4
  Top Layer w0.5: LED1.2 V2.C
NetLED2_1: LED2.1 R7.1 | length 4.7
  Top Layer w0.5: R7.1 105.537,45.847 106.299,46.609 LED2.1
NetLED2_2: LED2.2 V1.C | length 3
  Top Layer w0.5: LED2.2 106.299,51.816 V1.C
NetQ1_D: Q1.D R8.1 | length 2.2
  Top Layer w0.5: R8.1 Q1.D
NetQ1_G: Q1.G R9.1 R12.2 | length 5.4
  Top Layer w0.5: Q1.G@108.613,84.201 R12.2@111.252,84.201 ; R9.1@108.717,81.412 Q1.G
NetR1_1: R1.1 SW1.2 | length 13.4
  Top Layer w0.5: SW1.2@84.242,37.429 SW1.2@92.542,37.429 ; 88.392,37.429 R1.1@88.392,42.545
NetR3_1: R3.1 SW2.2 | length 13.4
  Top Layer w0.5: SW2.2@101.387,37.429 SW2.2@109.687,37.429 ; 103.289,37.429 R3.1
NetR10_2: R10.2 V1.B | length 3
  Top Layer w0.5: V1.B R10.2@107.249,59.182
NetR11_2: R11.2 V2.B | length 2.1
  Top Layer w0.5: V2.B R11.2@97.874,56.393
NetR14_2: R14.2 U1.8 | length 5
  Top Layer w0.5: R14.2 88.392,66.167 89.52,67.295 U1.8
VBUS: C11.1 F1.1 R14.1 U1.11 | length 23.6
  Top Layer w0.5: F1.1@85.567,76.797 C11.1@87.472,76.797 ; F1.1 85.598,65.024 87.287,63.335 R14.1 ; R14.1@88.392,63.352 94.051,63.352 U1.11
VDD: C9.1 C10.1 J2.2 R1.2 R3.2 R6.2 R7.2 R13.1 U1.7 | length 76.4
  Top Layer w0.5: 86.868,44.196 101.689,44.196 ; C9.1@86.868,68.295 U1.7 v1(94.076,68.295) ; R3.2 101.689,44.196 ; R7.2 101.689,44.196 ; J2.2@113.919,54.102 112.522,54.102 112.014,53.594 112.014,45.558 110.652,44.196 101.689,44.196
  Top Layer w0.6: R1.2 86.868,42.583 86.868,44.196 R13.1 v1(89.065,49.873)
  Bottom Layer w0.6: v1(89.065,49.873) 94.076,54.884 v1(94.076,68.295)
pads on no net: "LED1. " "LED2. " U1.1 U1.2 U1.3 U1.4 U1.5 U1.6 U1.9 U1.14 U1.16 U1.17 U1.18 U1.19 U1.20 U1.22 U1.23 U1.24 U1.28 U1.31 U1.32 U1.33 U1.36 U1.37 U1.38 U1.39 U1.42 U1.43 U1.44 U1.45 U1.46 U1.49 U1.50 USB1.4

## Polygon pours and split planes (outlines as drawn)
GND on Top Layer "Top Layer-No Net" (solid, pour order 0): 78.232,90.17 78.232,28.194 79.248,27.178 127.127,27.178 127.127,27.305 127.762,27.94 127.762,88.519 127.762,88.773 126.492,90.043 126.365,90.17
GND on Bottom Layer "Top Layer-No Net" (solid, pour order 2): 78.359,89.027 78.359,28.067 79.248,27.178 126.746,27.178 127,27.432 127.508,27.94 127.762,27.94 127.762,88.519 127.635,88.646 126.492,89.789 79.121,89.789

## Keep-outs
Keep-Out Layer:
  pour cut-out: 120.523,89.408 120.904,89.789 126.873,89.789 127.762,88.9 127.762,27.813 127.508,27.559 120.523,27.559
  lines w0.254: 77.851,27.94 78.613,27.178 127.127,27.178 127.762,27.813 127.762,88.9 126.873,89.789 78.74,89.789 77.851,88.9 77.851,27.94

## Silkscreen, mask and mechanical layers (free items; w line width, h text height)
Top Overlay:
  text "VH_ON->" at 83.693,64.897 h0.6
  text "<-VL_ON" at 87.618,51.181 h0.6
  text "+" at 84.074,43.434 h0.8